# Altium PCB FinallyPCB.PcbDoc
Units mil, origin at the board's own origin, x right, y up, seen from the top; angles counter-clockwise.
Board outline 3947.08 x 798.11 mil, 2 copper layers (Top Layer, Bottom Layer); 50 components, 38 nets, 166 pads, 18 vias.
Unrouted connection lines stored in the file: 3.
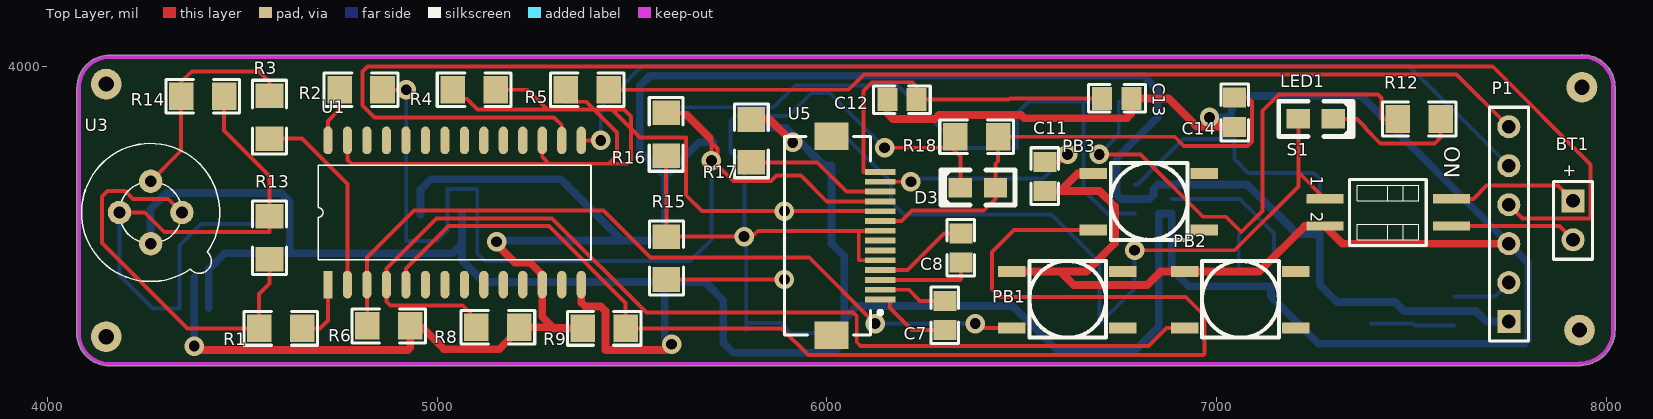
[diagram p0: Top Layer view]
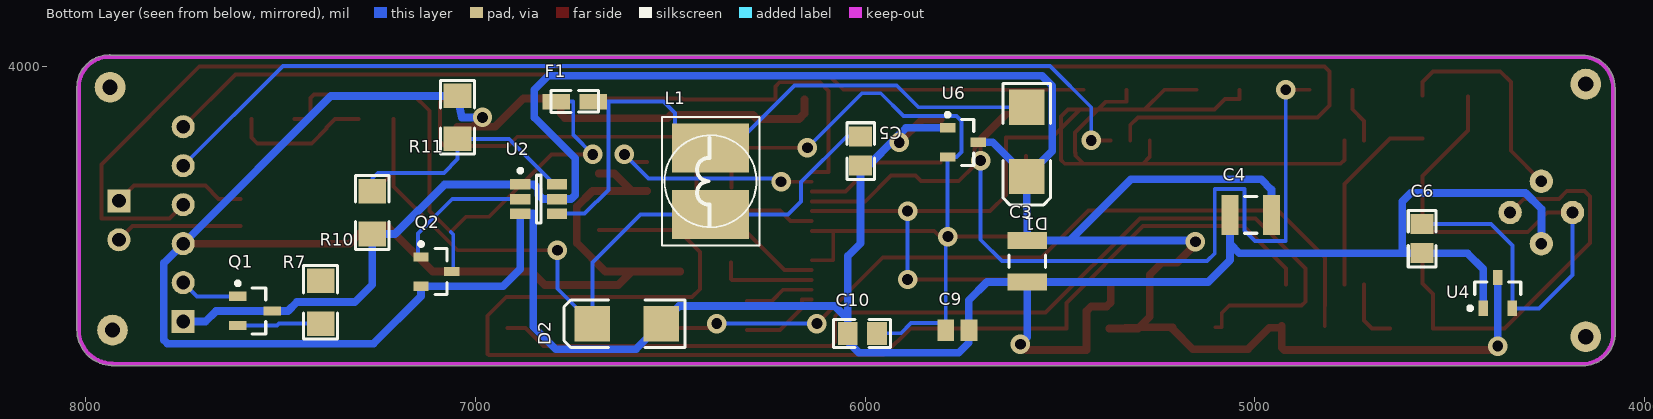
[diagram p1: Bottom Layer view, seen from below]

## Layer stack, top to bottom
Top Solder: solder mask 0.4, Solder Resist, Dk 3.5
Top Layer: signal copper 1.4
Dielectric1: dielectric 12.6, FR-4, Dk 4.8
Bottom Layer: signal copper 1.4
Bottom Solder: solder mask 0.4, Solder Resist, Dk 3.5

## Board outline
4075.77,3308.6 4075.77,3312.41 cw(c4159.43,3315.02) 4075.73,3314.71 cw(c4080.75,3314.73) 4075.77,3315.36 4075.77,3945 cw(c4080.79,3945) 4076.25,3947.14 cw(c4159.93,3945.17) 4159.3,4028.86 cw(c4160,4023.9) 4160,4028.91 7937.22,4028.91 cw(c7939.43,4024.41) 7939.45,4029.42 cw(c7939.11,3945.73) 8022.8,3946.03 cw(c8017.79,3946.02) 8022.8,3946.02 cw(c8017.79,3946.02) 8022.78,3945.51 cw(c8017.8,3944.94) 8022.81,3944.94 8022.81,3323.99 cw(c8017.8,3323.99) 8022.81,3323.8 cw(c8017.8,3323.64) 8022.81,3323.64 cw(c8017.8,3323.64) 8022.81,3323.62 cw(c7931.22,3323.99) 7934.18,3232.45 cw(c7931.22,3236.5) 7931.22,3231.48 4160.37,3231.48 cw(c4159.11,3236.33) 4159.09,3231.32 cw(c4159.43,3315.02) 4076.15,3306.7 cw(c4080.79,3308.6)

## Design rules (kind name [scope] priority, off if disabled: settings)
Clearance [All] p1: gap=10 ignorepadtopadclearanceinfootprint=FALSE except(0: Arc-Hole Track-Hole SMDPad-Hole THPad-Hole Via-Hole Fill-Hole Poly-Hole Region-Hole Text-Hole)
FabricationTestPointUsage TestPointUsage [All] p1: valid=0 allowmultiple=FALSE
FabricationTestpoint Testpoint [All] p1: side=3 testpointundercomponent=TRUE minsize=40 maxsize=100 preferedsize=60 minholesize=0 maxholesize=40 preferedholesize=32 testpointgrid=1 allowsidetop=TRUE allowsidebottom=TRUE usegrid=TRUE gridtolerance=0.01
PolygonConnect [All] p1: connectstyle=Relief reliefconductorwidth=10 reliefentries=4 polygonreliefangle="90 Angle" airgapwidth=10
RoutingVias [All] p1: holewidth=28 width=50 viastyle="Through Hole" minholewidth=28 minwidth=50 maxholewidth=28 maxwidth=50
SilkToSolderMaskClearance SilkscreenOverComponentPads [IsPad] p1: minsilkscreentomaskgap=10 clearancetoexposedcopper=TRUE
SolderMaskExpansion [All] p1: expansion=4
Width Width_GND [InNet('GND')] p1: maxlimit=20 minlimit=20 preferedwidth=20
Width Width_VCC50 [InNet('VCC50')] p2: maxlimit=20 minlimit=20 preferedwidth=20
Width [All] p3: maxlimit=10 minlimit=10 preferedwidth=10
27 further rules are at their usual default settings.

## Classes and differential pairs
component class PowerModel: BT1 C3 C4 C5 D1 D2 F1 L1 LED1 Q2 R10 R11 R12 S1 U2
component class SensorModel: C6 R13 R14 U3 U4
component class LCD_Model: C7 C8 C9 C10 C11 C12 C13 C14 D3 R15 R16 R17 R18 U5 U6
component class MCU_Model: P1 PB1 PB2 PB3 Q1 R1 R2 R3 R4 R5 R6 R7 R8 R9 U1

## Components (designator, comment, footprint, x,y, rotation, side; value= is the part's Value field where it differs from the comment)
BT1 "Battery" BAT-2 7915,3605 r270 top locked
C3 "" C1210 5584.07,3499.92 r90 bottom value=22uF
C4 "" C1210 5010.84,3618.94 r180 bottom value=22uF
C5 "" cap-0805 5995.45,3741.06 r90 bottom value=15uF
C6 "" cap-0805 4555.48,3516.07 r90 bottom value=1.0uF
C7 "Cap" cap-0805 6286.58,3402.71 r270 top value=1uF
C8 "Cap" cap-0805 6328.3,3575.82 r270 top value=1uF
C9 "Cap Pol3" C0805 5763.67,3323.4 r180 bottom value=4.7uF
C10 "" cap-0805 6049.37,3298.7 r180 bottom value=1.0uF
C11 "Cap" cap-0805 6543.7,3759.57 r270 top locked value=2.2uF
C12 "Cap" cap-0805 6151.23,3898.37 r0 top value=4.7uF
C13 "Cap" cap-0805 6786.02,3933.77 r180 top value=0.1uF
C14 "Cap" cap-0805 7062.2,3840.18 r90 top value=4.7uF
D1 "" SMB 5585.46,3806.16 r270 bottom
D2 "" SMB 6611.63,3339.43 r0 bottom
D3 "Diode 1N4148" PQX-DIO-0805 6487.83,3639.01 r180 top
F1 "" "RES-0603 - 1" 6743.43,3646.94 r180 bottom
L1 "" INDUCE2 6396.77,3805.16 r270 bottom locked value=4.7uH
LED1 "LED" DIO-0805 7210,3865 r0 top locked
P1 "STCISP/BLE" HDR1X6 7750,3345 r90 top locked
PB1 "UP" Botton 6514.65,3298.7 r90 top
PB2 "DOWN" Botton 6958.18,3298.7 r90 top locked
PB3 "OK" Botton 6723.57,3549.9 r90 top locked
Q1 "PNP" SOT-23B_N 7565.71,3372.4 r180 bottom
Q2 "" SOT23-3_L 7165.36,3537.27 r180 bottom
R1 "" RES-1206 4291.59,2926.02 r180 top value=330
R2 "" RES-1206 4497.8,3538.43 r180 top locked value=330
R3 "" RES-1206 4168.43,4176.97 r90 top locked value=330
R4 "" RES-1206 4787.91,3538.43 r180 top locked value=330
R5 "" RES-1206 5078.03,3538.43 r180 top locked value=1k
R6 "" RES-1206 4568.79,2932.37 r180 top value=56K
R7 "" RES-1206 7799.02,3701.98 r90 bottom value=5.6k
R8 "" RES-1206 4848.99,2928.96 r180 top value=56K
R9 "" RES-1206 5735.88,3729.16 r0 top value=56K
R10 "" RES-1206 6863.43,3317.8 r270 bottom value=47K
R11 "" RES-1206 7447.75,4176.09 r90 bottom value=15k
R12 "" RES-1206 7826.97,4266.57 r0 top locked value=1K
R13 "" RES-1206 4971.57,3253.03 r270 top locked value=10K
R14 "" RES-1206 4091.45,3521.76 r180 top value=10k
R15 "Res3" RES-1206 5990.06,3201.05 r270 top value=10K
R16 "Res3" RES-1206 5186.1,4132.44 r90 top locked value=10K
R17 "Res3" RES-1206 6208.01,3501.44 r270 top value=560K
R18 "Res3" RES-1206 6077.18,3417.72 r180 top value=4.7K
S1 "SW DIP-2" DIP_SW_2WAY_SMD02 7673.23,3705 r270 top locked
U1 "STC15F2K60S2_SOP28_SKDIP28" SOP28 4720,3439.92 r90 top locked
U2 "RT9266" SOT23-6_M 6837.8,3659.44 r180 bottom locked
U3 "MLX90614系列" MLX90614XCX 4265,3625 r0 top locked
U4 "662K" SOT23-3_L 4440.93,3353.87 r90 bottom
U5 "091OLED-14" 091OLED-FFC/FPC-0.64 6181.75,3385.43 r90 top locked
U6 "662K" SOT23-3_L 5814.04,3869.01 r180 bottom locked

## Footprints (in the part's own frame and the unit in brackets; to place one, negate y for a bottom-side part, rotate by r counter-clockwise, add the part's x,y. Pads: shape width x height; smd on the part's side, far side on the other; paste and mask are expansions set on the pad)
091OLED-FFC/FPC-0.64 [mm]
  rect 0.38x2 smd: 1(0.409,1.13) 2(1.049,1.13) 3(1.689,1.13) 4(2.329,1.13) 5(2.969,1.13) 6(3.609,1.13) 7(4.249,1.13) 8(4.889,1.13) 9(5.529,1.13) 10(6.169,1.13) 11(6.809,1.13) 12(7.449,1.13) 13(8.089,1.13) 14(8.729,1.13)
  rect 1.8x2.2 smd: 15(11.049,4.318) 16(-1.905,4.318)
  silkscreen extent -1.89,1 11.05,7.38
BAT-2 [mm] "Battery; 2 Leads"
  rect 1.5x1.5 hole 0.9: 1(-1.27,0)
  round 1.5 hole 0.9: 2(1.27,0)
  silkscreen extent -2.54,-1.27 2.54,1.27
Botton [mm]
  rect 0.7x1.8 smd: 1(0.762,1.016) 2(4.445,1.016) 3(4.445,-6.223) 4(0.762,-6.223)
  silkscreen extent 0.13,-5.13 5.13,-0.13
C0805 [mm] "Chip Capacitor, Body 2.0x1.3mm, IPC High Density"
  rect 1.1x1.4 smd: 1(-0.75,0) 2(0.75,0)
  body extent -1.1,-0.72 1.1,0.72, height 1.4
C1210 [mm] "Chip Capacitor, Body 3.2x2.5mm, IPC High Density"
  rect 1.1x2.6 smd: 1(-1.35,0) 2(1.35,0)
  silkscreen extent -0.4,-1.2 0.4,1.2, body extent -1.7,-1.35 1.7,1.35, height 1.3
cap-0805 [mm]
  rect 1.3x1.5 smd: 1(0.116,0.414) 2(2.016,0.414)
  silkscreen extent -0.8,-0.5 2.9,1.3
DIO-0805 [mil]
  rect 60x50 smd: A(0,0) K(90,0)
  silkscreen extent -50,-45 140,46
DIP_SW_2WAY_SMD02 [mil] "DIP Switch; 4 Leads"
  rect 23.62x94.49 smd: 1(45,-395) 2(115,-395) 3(115,-70) 4(45,-70)
  silkscreen extent -5,-332 165,-135
HDR1X6 [mm] "Connector; Header; 6 Position"
  rect 1.5x1.5 hole 0.9: 1(0,0)
  round 1.5 hole 0.9: 2(2.54,0) 3(5.08,0) 4(7.62,0) 5(10.16,0) 6(12.7,0)
  silkscreen extent -1.27,-1.27 13.97,1.27
INDUCE2 [mm] "5.0mm*6.0mm"
  rect 3.2x5 smd: 1(0.381,0) 2(4.699,0)
  silkscreen extent -1.65,-3.17 6.73,3.18
MLX90614XCX [mil]
  round 60 hole 30: 1(80.32,0) 2(0,80) 3(-80,0) 4(0,-80)
  silkscreen extent -177,-177 177,177
PQX-DIO-0805 [mil]
  rect 60x50 smd: 1(55,-50) 2(145,-50)
  silkscreen extent 5,-95 195,-4
"RES-0603 - 1" [mm] "1/10W"
  rect 1.8x1 smd: 1(-1.25,6.67) 2(1.15,6.67)
  silkscreen extent -1.6,5.97 1.5,7.4
RES-1206 [mm] "1/4W"
  rect 1.6x1.8 smd: 1(-9.2,-10.2) 2(-6.4,-10.2)
  silkscreen extent -10.2,-11.3 -5.4,-9.1
SMB [mm] "DO-214-AA/SMB; 2 C-Bend Leads; Body 5.3 x 3.6 mm, inc. leads (LxW)"
  rect 2.3x2.3 smd: 1(-2.25,0) 2(2.25,0)
  silkscreen extent -3.8,-1.55 4.1,1.55
SOP28 [mm]
  rect 1.8x0.6 smd: 1(0,0)
  oval 1.8x0.6 smd: 2(0,-1.27) 3(0,-2.54) 4(0,-3.81) 5(0,-5.08) 6(0,-6.35) 7(0,-7.62) 8(0,-8.89) 9(0,-10.16) 10(0,-11.43) 11(0,-12.7) 12(0,-13.97) 13(0,-15.24) 14(0,-16.51) 15(9.4,-16.51) 16(9.4,-15.24) 17(9.4,-13.97) 18(9.4,-12.7) 19(9.4,-11.43) 20(9.4,-10.16) 21(9.4,-8.89) 22(9.4,-7.62) 23(9.4,-6.35) 24(9.4,-5.08) 25(9.4,-3.81) 26(9.4,-2.54) 27(9.4,-1.27) 28(9.4,0)
  silkscreen extent 1.64,-17.14 7.77,0.64
SOT23-3_L [mm] "SOT23, 3-Leads, Body 2.9x1.3mm, Pitch 0.95mm, Lead Span 2.3mm, IPC High Density"
  rect 1x0.6 smd: 1(0.651,-0.677) 2(0.651,-2.577) 3(2.651,-1.627)
  silkscreen extent 0.53,-3.13 2.35,0.3, body extent 0.95,-3.13 2.35,-0.13, height 1.2
SOT23-6_M [mm] "SOT23, 6-Leads, Body 2.9x1.6mm, Pitch 0.95mm, Lead Span 2.7mm, IPC Low Density"
  rect 1.321x0.686 smd: 1(-1.2,0.95) 2(-1.2,0) 3(-1.2,-0.95) 4(1.2,-0.95) 5(1.2,0) 6(1.2,0.95)
  silkscreen extent -1.33,-1.55 0.15,1.97, body extent -0.9,-1.55 0.9,1.55, height 1.45
SOT-23B_N [mm] "SOT23, 3-Leads, Body 2.9x1.3mm, Pitch 0.95mm, Lead Span 2.4mm, IPC Medium Density"
  rect 1.15x0.6 smd: 1(-1.125,0.95) 2(-1.125,-0.95) 3(1.125,0)
  silkscreen extent -1.25,-1.5 0.7,1.92, body extent -0.7,-1.5 0.7,1.5, height 1.14

## Part data
BT1: "Multicell Battery", LatestRevisionDate=17-Jul-2002, LatestRevisionNote="Re-released for DXP Platform.", PackageDescription="Battery; 2 Leads", PackageReference=BAT-2, Published=24-Mar-1999, Publisher="Altium Limited"
C3 C4 C5: library part "Cap Semi", "Capacitor (Semiconductor SIM Model)", LatestRevisionDate=29-May-2009, LatestRevisionNote="IPC-7351 Footprint Added.", PackageDescription="Chip Capacitor", PackageReference=C1206, Published=8-Jun-2000, Publisher="Altium Limited"
C6 C10: library part Cap, "Capacitor", LatestRevisionDate=17-Jul-2002, LatestRevisionNote="Re-released for DXP Platform.", PackageDescription="Radial Cap, Thru-Hole; 2 Leads; 0.3 in Pin Spacing", PackageReference=RAD-0.3, Published=8-Jun-2000, Publisher="Altium Limited"
C7 C8 C11 C12 C13 C14: "Capacitor", LatestRevisionDate=17-Jul-2002, LatestRevisionNote="Re-released for DXP Platform.", PackageDescription="Radial Cap, Thru-Hole; 2 Leads; 0.3 in Pin Spacing", PackageReference=RAD-0.3, Published=8-Jun-2000, Publisher="Altium Limited"
C9: "Polarized Capacitor (Surface Mount)", LatestRevisionDate=29-May-2009, LatestRevisionNote="IPC-7351 Footprint Added.", PackageDescription="Chip Capacitor", PackageReference=C0805, Published=8-Jun-2000, Publisher="Altium Limited"
D1 D2: library part "D Schottky", "Schottky Diode", Code_JEDEC=DO-214-AA, LatestRevisionDate=17-Jul-2002, LatestRevisionNote="Re-released for DXP Platform.", PackageDescription="DO-214-AA/SMB; 2 C-Bend Leads; Body 5.3 x 3.6 mm, inc. leads (LxW)", PackageReference=SMB, Published=8-Jun-2000, Publisher="Altium Limited"
D3: "High Conductance Fast Diode", Code_JEDEC=DO-204-AH, ComponentLink1Description="Manufacturer Link", ComponentLink1URL=http://www.fairchildsemi.com/, ComponentLink2Description=Datasheet, ComponentLink2URL=http://www.fairchildsemi.com/ds/1N%2F1N4148.pdf, DatasheetVersion=1997, LatestRevisionDate=17-Jul-2002, LatestRevisionNote="Re-released for DXP Platform.", PackageDescription="Diode, Axial; Body 3.8 x 1.9 mm (LxDia. max), Lead Dia. 0.53 mm (max)", PackageReference=DO-35, Published=8-Jun-2000, Publisher="Altium Limited"
F1: library part "Fuse 2", "Fuse", LatestRevisionDate=17-Jul-2002, LatestRevisionNote="Re-released for DXP Platform.", PackageDescription="Thru-Hole; 2 Leads", PackageReference=PIN-W2/E2.8, Published=8-Jun-2000, Publisher="Altium Limited"
L1: library part Inductor, "Inductor", Code_IEC=1005, Code_JEITA=0402, LatestRevisionDate=29-May-2009, LatestRevisionNote="IPC-7351 Footprint Added.", PackageDescription="Chip Inductor", PackageReference=0402-A, Published=8-Jun-2000, Publisher="Altium Limited"
LED1: library part LED_1, "发光二级管"
P1: library part "Header 6", "Header, 6-Pin", LatestRevisionDate=17-Jul-2002, LatestRevisionNote="Re-released for DXP Platform.", Publisher="Altium Limited"
PB1 PB2 PB3: library part PB
Q1: "PNP Bipolar Transistor", LatestRevisionDate=29-May-2009, LatestRevisionNote="IPC-7351 Footprint Added.", PackageDescription="3-Pin SOT-23 Package 0.95 mm Pitch, 2.4 mm Lead Span", PackageReference=SOT-23B, PackageVersion=Aug-1999, Published=8-Jun-2000, Publisher="Altium Limited"
Q2: library part NMOS-2, "N-Channel Power MOSFET", ComponentLink1Description="Manufacturer Link", ComponentLink1URL=http://www.irf.com/, DatasheetVersion=PD-9.814, LatestRevisionDate=17-Jul-2002, LatestRevisionNote="Re-released for DXP Platform.", Note="Pin 2 is electrically connected to pin 4.", PackageDescription="TO, Thru-Hole, Vertical, Heatsink Mounted; 3 In-Line Leads; Pitch 2.54 mm", PackageReference=TO-220AB, PackageVersion=Feb-1997, Published=8-Jun-2000, Publisher="Altium Limited"
R1 R2 R3 R4 R5 R6 R7 R8 R9 R10 R11 R12 R13 R14: library part Res3, "Resistor", LatestRevisionDate=29-May-2009, LatestRevisionNote="IPC-7351 Footprint Added.", PackageDescription="Chip Resistor", PackageReference=J1-0603, Published=8-Jun-2000, Publisher="Altium Limited"
R15 R16 R17 R18: "Resistor", LatestRevisionDate=29-May-2009, LatestRevisionNote="IPC-7351 Footprint Added.", PackageDescription="Chip Resistor", PackageReference=J1-0603, Published=8-Jun-2000, Publisher="Altium Limited"
S1: "DIP Switch, 2 Position, SPST", LatestRevisionDate=17-Jul-2002, LatestRevisionNote="Re-released for DXP Platform.", PackageReference=DIP-4, Published=24-Mar-1999, Publisher="Altium Limited"
U2: library part RT9266(31-32N)
U3: "迈来芯高精度红外测温传感器"
U5: library part 091oled-14pin

## Free pads (board coordinates)
  round 78.74 hole 39.37: 1(4150.89,3954.5) 3(4150.89,3306.55) 4(7931.39,3323.32) 5(7937.64,3946.33)

## Via types
v1: diameter 50, hole 28, Top Layer to Bottom Layer, 18 vias

## Nets (pads, with @x,y where several pads share a name; then routed paths per layer and width w, separated by ;. In a path a pad name is that pad's centre, name@x,y a point inside that pad or via, vN(x,y) a via of type N, cw(c..) or ccw(c..) an arc to the next point about the centre after c; other vN are vias at no path point)
BLE_SW: R7.2 U1.18
DOWN: PB2.1 R8.2 U1.4 | length 2660.4
  Top Layer w10: R8.2 5085,3330.54 5085,3367 5066,3386 4880,3386 4870,3396 U1.4 4870,3481 4999,3610 5295.1,3610 5537.1,3368 6067.71,3368 6076.83,3358.89 6076.83,3292 6086.83,3282 6825,3282 6871.7,3328.7 PB2.1
GND: C3.1 C4.1 C5.1 C6.1 C9.2 C10.1 C11.2 C12.1 C13.1 C14.1 D2.1 P1.3 PB1.2 PB2.2 PB3.2 Q2.2 R11.2 R17.1 S1.2 U1.14 U2.3 U3.4 U4.1 U5.7 U6.1 | length 10681.5
  Top Layer w20: U1.14 5370,3394 5380,3384 5420,3384 5432,3372 5432,3272 5587,3272 v1(5602,3287) ; R17.1 5854,3863.64 v1(5912.64,3805) ; C12.1 6155.79,3879.21 6170,3865 6278,3865 6288,3875 6499,3875 6507,3867 6770,3867 6781.45,3878.45 C13.1 6877,3917.47 6949.72,3844.75 7006.25,3844.75 ; PB1.2 6599,3473.7 ; C11.2 6599,3680.2 ; PB3.2 6643.7,3724.9 6599,3680.2 ; v1(6982,3869) 7006.25,3844.75 ; C14.1 7006.25,3844.75 ; P1.3 7323.23,3545 S1.2 7226.13,3590 7109.83,3473.7 PB2.2 6856.7,3473.7 6822,3439 6633.7,3439 6599,3473.7 ; 6599,3473.7 6666.7,3473.7 6740,3547 6740,3640 6699.8,3680.2 6599,3680.2
  Bottom Layer w20: U3.4 4265,3634.29 4305.71,3675 4600,3675 4622,3653 4622,3532.64 4610,3520.64 ; U4.1 4414.28,3480 4454.92,3520.64 C6.1 4610,3520.64 ; C4.1 5063.99,3544.63 ; v1(5602,3287) 5584,3305 C3.1@5584,3446.77 ; U6.1 5895,3842.35 v1@5922.5,3814.85 ; v1(5912.64,3805) v1@5922.5,3814.85 ; v1(6982,3869) 7035.17,3869 R11.2 7370.88,3924.12 P1.3 7800,3495 7800,3298 7790,3288 7262,3288 7139.73,3410.27 Q2.2 6929.19,3435.81 6885,3480 U2.3 6852,3622.04 6852,3332 6794,3274 6588.48,3274 D2.1 6477.48,3385 6078,3385 6044.8,3351.8 ; 4610,3520.64 5040,3520.64 5063.99,3544.63 ; 5063.99,3544.63 5063.99,3502.78 5120,3446.77 C3.1@5584,3446.77 ; C3.1@5584,3446.77 C3.1 5687.37,3446.77 5734.14,3400 C9.2 5734.14,3290.86 5760,3265 6016,3265 6044.8,3293.8 C10.1 6044.8,3351.8 ; v1@5922.5,3814.85 5991.73,3745.62 C5.1 6011.75,3546.06 6044.8,3513 6044.8,3351.8
NetBT1_1: BT1.1 S1.4 | length 342
  Top Layer w10: S1.4 7659,3660 7693,3694 7876,3694 BT1.1
NetBT1_2: BT1.2 S1.3 | length 326.3
  Top Layer w10: S1.3 7880,3590 BT1.2
NetC5_2: C5.2 D2.2 L1.2 LED1.A S1.1 | length 1992.2
  Top Layer w10: v1(6790,3528) 7046,3528 7210,3692 7210,3728.23 ; LED1.A 7210,3728.23 ; S1.1 7210,3728.23
  Bottom Layer w10: C5.2 6047.3,3820.43 6164.96,3702.77 6164.96,3652.96 6197.76,3620.16 L1.2 6576.84,3620.16 6700.22,3496.78 D2.2 6790,3429.21 v1(6790,3528)
NetC6_2: C6.2 R13.1 R14.1 U3.3 U4.2 | length 1568.9
  Top Layer w10: U3.3 4250,3625 4300,3575 4570,3575 R13.1 4570,3719 4453.65,3835.35 R14.1
  Bottom Layer w10: U3.3 4185,3465 4271,3379 4339.48,3379 U4.2 4339.48,3540.52 4394.39,3595.44 C6.2
NetC7_1: C7.1 U5.2 | length 177.5
  Top Layer w10: U5.2 6211,3426.73 6239.59,3398.14 C7.1
NetC7_2: C7.2 U5.1 | length 210.4
  Top Layer w10: U5.1 6162,3401.53 6162,3380.34 6219,3323.34 C7.2
NetC8_1: C8.1 U5.4 | length 246.3
  Top Layer w10: U5.4 6206.87,3477.12 6301,3571.25 C8.1
NetC8_2: C8.2 U5.3 | length 250.6
  Top Layer w10: U5.3 6342.52,3451.92 6344.6,3454 C8.2
NetC9_1: C9.1 C10.2 D3.2 R15.1 R16.1 R18.2 U5.5 U5.8 U6.2 | length 2451.2
  Top Layer w10: R16.1 5587.67,3666.82 5588.49,3666 R15.1 v1(5788,3563.25) 5808.25,3563.25 5822.91,3577.91 6082,3577.91 ; U5.5 6082,3502.32 6082,3577.91 ; U5.8 6082,3577.91 ; v1(6148.15,3791) R18.2@6320,3791 ; R18.2 6329.15,3791 R18.2@6320,3791 ; D3.2 6342.83,3768.17 R18.2@6320,3791
  Bottom Layer w10: v1(5788,3563.25) v1@5788.41,3563.66 ; C9.1 C9.1@5793.2,3341.12 ; C10.2 5908.12,3315 5882,3341.12 C9.1@5793.2,3341.12 ; v1(6148.15,3791) 6008.15,3931 5960,3931 5901.68,3872.68 5765.68,3872.68 5753,3860 5753,3780 5765.45,3767.55 U6.2 v1@5788.41,3563.66 ; v1@5788.41,3563.66 5788.41,3547.79 5793.2,3543 C9.1@5793.2,3341.12
NetC11_1: C11.1 U5.13 | length 575.7
  Top Layer w10: U5.13 v1(6215.89,3703.89) ; C11.1 6599,3755 v1(6618,3774)
  Bottom Layer w10: v1(6215.89,3703.89) 6224,3712 6556,3712 v1(6618,3774)
NetC12_2: C12.2 C13.2 U5.14 | length 912.5
  Top Layer w10: U5.14 6094,3729.09 6094,3937 6116.2,3959.2 6220,3959.2 6230.6,3948.6 C12.2 6467,3914.67 6469.8,3917.47 C13.2
NetD1_1: D1.1 F1.2 L1.1 U2.4 | length 1688.2
  Bottom Layer w10: D1.1 5585.46,3895 5863,3895 5919,3951 6181.16,3951 6342,3790.16 L1.1 6488,3790.16 6488,3880 6517.54,3909.54 6659,3909.54 ; F1.2 6659,3909.54 ; U2.4 6720,3622.04 6659,3683.04 6659,3909.54
NetF1_1: F1.1 Q2.3 R12.1 | length 1511
  Top Layer w10: v1(6699,3774) 6805,3774 6965,3614 7024,3614 7063.5,3574.5 7118,3629 7118,3886 7160,3928 7414,3928 7423,3919 7423,3865 R12.1
  Bottom Layer w10: v1(6699,3774) 6749,3824 6749,3909.54 F1.1 ; Q2.3 7057,3473.21 7057,3568 7063.5,3574.5
NetLED1_K: LED1.K R12.2 | length 357.1
  Top Layer w10: LED1.K 7360,3865 7382,3843 7382,3840 7420,3802 7560,3802 7575,3817 R12.2
NetP1_2: P1.2 Q1.1 | length 154.6
  Bottom Layer w10: Q1.1 7714.8,3409.8 P1.2
NetQ1_2: Q1.2 R7.1 | length 214.5
  Bottom Layer w10: R7.1 7504,3339.77 7508.77,3335 Q1.2
NetQ2_1: Q2.1 U2.2 | length 368.2
  Bottom Layer w10: U2.2 7059.56,3659.44 7148,3571 7148,3510.62 Q2.1
NetR1_1: R1.1 U1.1 | length 166.8
  Top Layer w10: R1.1 4700,3327.59 4720,3347.59 U1.1
NetR1_2: R1.2 R13.2 U3.1 | length 1035.7
  Top Layer w10: U3.1 4310.32,3660 4220,3660 4200,3680 4154,3680 4140,3666 4140,3547 4359.41,3327.59 R1.2 4543.56,3416 4570,3442.44 R13.2
NetR2_2: R2.2 U1.28 | length 142.3
  Top Layer w10: U1.28 4720,3860 4749.76,3889.76 R2.2
NetR3_1: R3.1 U1.2 | length 506.4
  Top Layer w10: R3.1 4653.24,3814.76 4770,3698 U1.2
NetR3_2: R3.2 R14.2 U3.2 | length 571.4
  Top Layer w10: U3.2 4343.42,3783.42 R14.2 4343.42,3960 4370.42,3987 4543,3987 4570,3960 R3.2
NetR4_2: R4.2 U1.27 | length 1398
  Top Layer w10: U1.27 4770,3760 4780,3750 5488,3750 5498,3760 5498,3871 5480,3889 5104,3889 5077,3916 5039.88,3916 R4.2
NetR5_2: R5.2 U1.17 | length 504.9
  Top Layer w10: U1.17 5270,3767 5287,3750 5440,3750 5460.48,3770.48 5460.48,3777.48 5462,3779 5462,3830 5383,3909 5330,3909 R5.2
NetR10_1: R10.1 R11.1 U2.6 | length 627.5
  Bottom Layer w10: U2.6 6797.14,3696.84 6914.19,3813.88 R11.1 7046.17,3761.83 7081.24,3726.76 7250,3726.76 7265,3711.76 R10.1
NetR17_2: R17.2 U5.12 | length 361.8
  Top Layer w10: R17.2 5975.59,3753.41 6050.3,3678.7 U5.12
OK: PB3.1 R9.2 U1.5 | length 3361.7
  Top Layer w10: U1.5 4920,3481 5029,3590 5286.81,3590 5483.91,3392.9 R9.2 5884,3327.59 5952.59,3259 6966,3259 6969,3262 6969,3360 6921,3408 6444,3408 6424,3428 6424,3523.9 6480,3579.9 PB3.1
RES#: C14.2 D3.1 R18.1 U5.9 | length 1298.2
  Top Layer w10: U5.9 6192,3603.11 6218.89,3630 6402.83,3630 6432.83,3660 D3.1 6432.83,3750 6439.39,3756.56 R18.1 6892.7,3819.3 6916,3796 7080,3796 7091,3807 7091,3908.55 7080,3919.55 C14.2
RXD: P1.5 U1.15 | length 2615
  Top Layer w10: U1.15 v1(5420,3810)
  Bottom Layer w10: v1(5420,3810) 5420,3895.02 5525.98,4001 7494,4001 P1.5
SCL: R4.1 R15.2 U5.10 | length 1680.6
  Top Layer w10: R4.1 5232,3940 5283,3889 5449,3889 5521,3817 5639,3817 5639,3669.3 5680,3628.3 v1(5891,3628.3) U5.10 ; R15.2 v1(5891,3453.02)
  Bottom Layer w10: v1(5891,3453.02) v1(5891,3628.3)
SDA: R2.1 R16.2 U5.11 | length 2590.8
  Top Layer w10: R2.1 v1(4921,3940) ; R16.2 5628.53,3880.47 ; v1(5704,3758) 5704,3805 ; U5.11 6000,3653.5 5933.5,3720 5871,3720 5857,3706 5760,3706 5720,3746 5720,3789 5704,3805 ; 5628.53,3880.47 5642.53,3880.47 5704,3819 5704,3805 ; 5628.53,3880.47 5704,3805
  Bottom Layer w10: v1(4921,3940) 4921,3552 5000,3552 5027,3579 5027,3685.12 5103,3685.12 5103,3520 5123,3500 5649,3500 5704,3555 v1(5704,3758)
STATE: P1.6 R5.1 | length 2381.6
  Top Layer w10: R5.1 6056,3940 6095.2,3979.2 7615.8,3979.2 P1.6
TXD: P1.4 U1.16 | length 4281.4
  Top Layer w10: U1.16 5320,3849 5300,3869 4839.54,3869 4808.54,3900 4808.54,3986.54 4821.2,3999.2 7708.8,3999.2 7960,3748 7960,3610 7785,3610 P1.4
UP: PB1.1 R6.2 U1.3 | length 2004.9
  Top Layer w10: R6.2 4820.76,3386 4820,3386.76 U1.3 4820,3509 4941,3630 5427,3630 5548,3509 5955,3509 v1(6124,3340) ; v1(6381,3340) 6392.3,3328.7 PB1.1
  Bottom Layer w10: v1(6124,3340) v1(6381,3340)
VCC50: C3.2 C4.2 D1.2 P1.1 Q1.3 R6.1 R8.1 R9.1 R10.2 U1.12 U2.1 U2.5 U4.3 U6.3 | length 6264.1
  Top Layer w20: v1(4376.88,3282) 4386.88,3272 4924.99,3272 4930.99,3278 R6.1@4930.99,3329 ; R6.1 R6.1@4930.99,3329 ; v1(5153,3550) 5153,3543 5200,3496 5239.36,3496 5270,3465.36 U1.12 5270,3357.59 5297.05,3330.54 ; R6.1@4930.99,3329 4963,3329 5018,3274 5159.19,3274 5211.19,3326 R8.1 5297.05,3330.54 ; 5297.05,3330.54 R9.1 5300,3327.59 5297.05,3330.54
  Bottom Layer w20: v1(4376.88,3282) U4.3 ; C4.2 4957.69,3683.69 4984.12,3710.12 5317.88,3710.12 5474.93,3553.07 ; v1(5153,3550) 5156.07,3553.07 5474.93,3553.07 ; U6.3 5672.83,3804.95 D1.2 ; P1.1 7693,3345 7665.6,3372.4 Q1.3 7481,3372.4 7458.4,3395 7310,3395 7265,3440 R10.2 7206.33,3569.76 7079.26,3696.84 U2.1 6850,3696.84 6838,3684.84 6838,3670 6827.44,3659.44 U2.5 6754.56,3659.44 6744,3670 6744,3764 6849,3869 6849,3940 6813,3976 5546.18,3976 5520.18,3950 5520.18,3782.86 D1.2 ; 5474.93,3553.07 C3.2 5584.07,3634 5585.46,3635.39 D1.2
pads on no net: PB1.3 PB1.4 PB2.3 PB2.4 PB3.3 PB3.4 U1.6 U1.7 U1.8 U1.9 U1.10 U1.11 U1.13 U1.19 U1.20 U1.21 U1.22 U1.23 U1.24 U1.25 U1.26 U5.6 U5.15 U5.16

## Keep-outs
Keep-Out Layer:
  lines w10: 4080.75,3314.73 ccw(c4159.43,3315.02) 4159.11,3236.33 ; 4080.79,3308.6 4080.79,3945 ; 4081.25,3945.49 cw(c4159.93,3945.17) 4159.64,4023.85 ; 4158.29,3236.5 4225,3236.5 7931.22,3236.5 ; 4160,4023.9 7941.76,4023.9 ; 7931.53,3237.41 ccw(c7931.22,3323.99) 8017.8,3323.64 ; 7939.43,4024.41 cw(c7939.11,3945.73) 8017.79,3946.02 ; 8017.8,3323.99 8017.8,3944.94

## Silkscreen, mask and mechanical layers (free items; w line width, h text height)
Mechanical 16:
  drawing of 1873 lines, arcs and shapes, not listed
  text "1" at 1427,7465 h31.5
  text "2" at 4287,7465 h31.5
  text "3" at 7167,7465 h31.5
  text "4" at 10037,7465 h31.5
  text "A" at 75,6559 h31.5
  text "A" at 11375,6559 h31.5
  text "B" at 75,4667 h31.5
  text "C" at 75,2757 h31.5
  text "C" at 11375,2757 h31.5
  text "ENGINEER:    潘全星" at 6850,1300 h100
  text "TITLE:    Portable Infrared Electronic Thermometer" at 8350,1300 h31.5
  text "PCB DESIGNER:   潘全星" at 6850,1005 h100
  text "D" at 75,867 h31.5
  text "D" at 11375,867 h31.5
  text "DATE:" at 6850,700 h31.5
  text "PART NO.:" at 8350,700 h31.5
  text "REV:" at 10450,700 h31.5
  text "Altium Limited" at 5550,600 h31.5
  text "2017-04-08" at 6900,580 h31.5
  text "12a Rodborough Rd" at 5550,500 h31.5
  text "Frenchs Forest" at 5550,400 h31.5
  text "FILE NAME:" at 6850,400 h31.5
  text "DWG NO:" at 8350,400 h31.5
  text "SCALE:" at 10450,400 h31.5
  text "NSW 2086" at 5550,300 h31.5
  text "PqxPCB.PcbDoc" at 6900,280 h31.5
  text "1" at 1427,65 h31.5
  text "2" at 4287,65 h31.5
  text "3" at 7167,65 h31.5
  text "4" at 10037,65 h31.5

## Text inside footprints (layer, text, board x,y; h text height)
BT1: Top Overlay "+" at 7892.28,3749.49 h31.5 r270
S1: Top Overlay "ON" at 7584.61,3795 h39.37 r270; Top Overlay "1" at 7241.69,3718.94 h31.5 r270; Top Overlay "2" at 7241.69,3627.4 h31.5 r270